# Altium PCB PCB.PcbDoc
Units mil, origin at the board's own origin, x right, y up, seen from the top; angles counter-clockwise.
Board outline 11290 x 5470 mil, 4 copper layers (Top Layer, Signal1, Signal2, Bottom Layer), stack 53.912 mil thick; 68 components, 74 nets, 190 pads, 16 vias.
Unrouted connection lines stored in the file: 1.
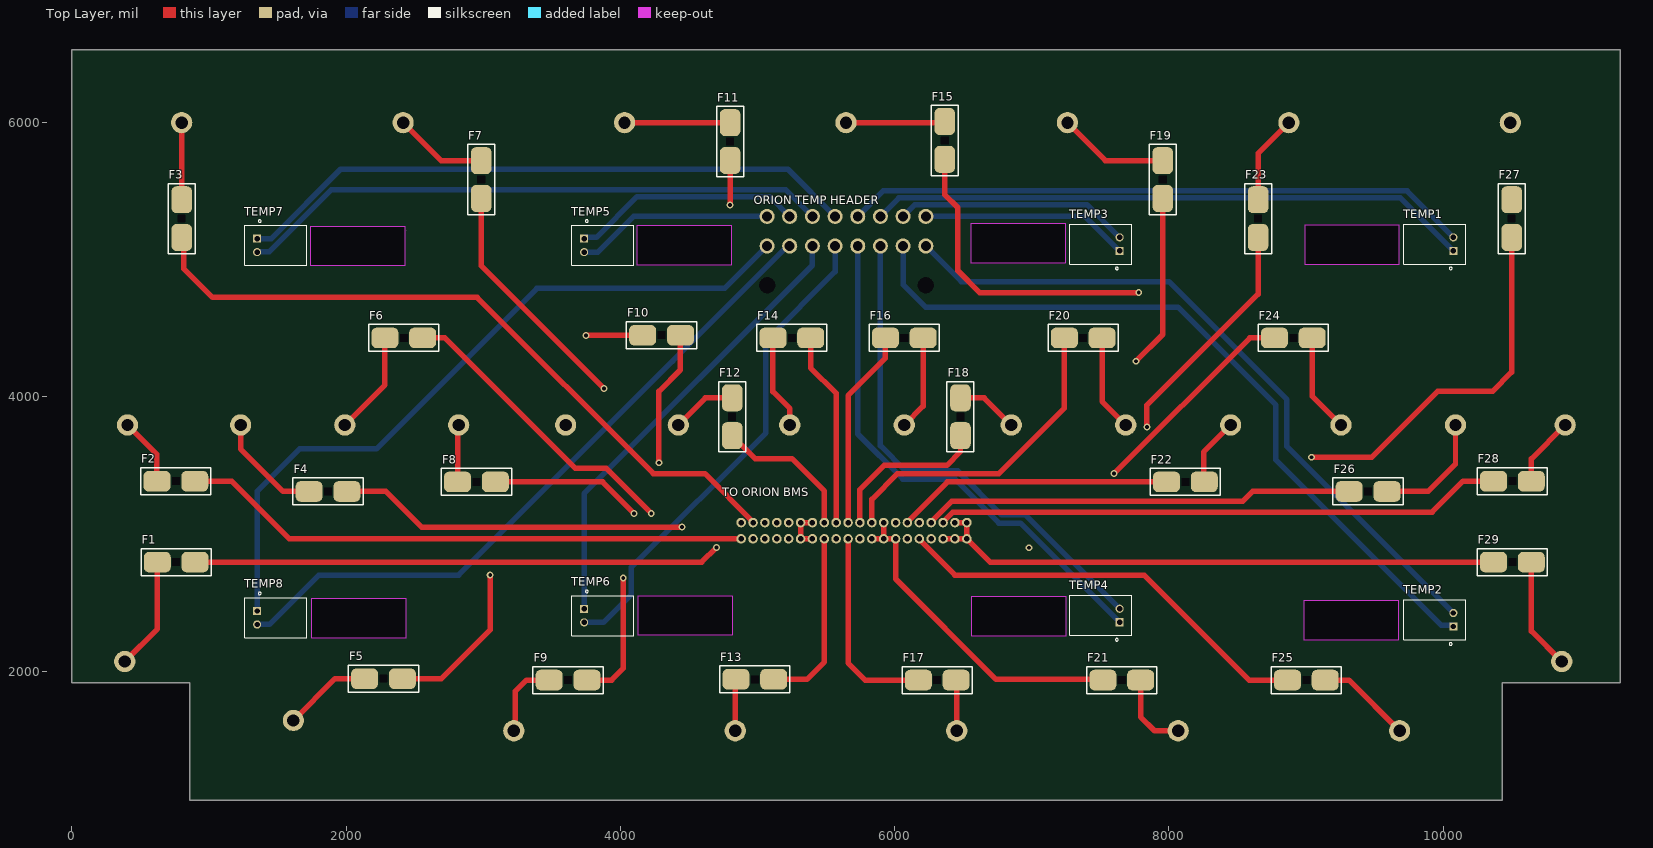
[diagram p0: Top Layer view]
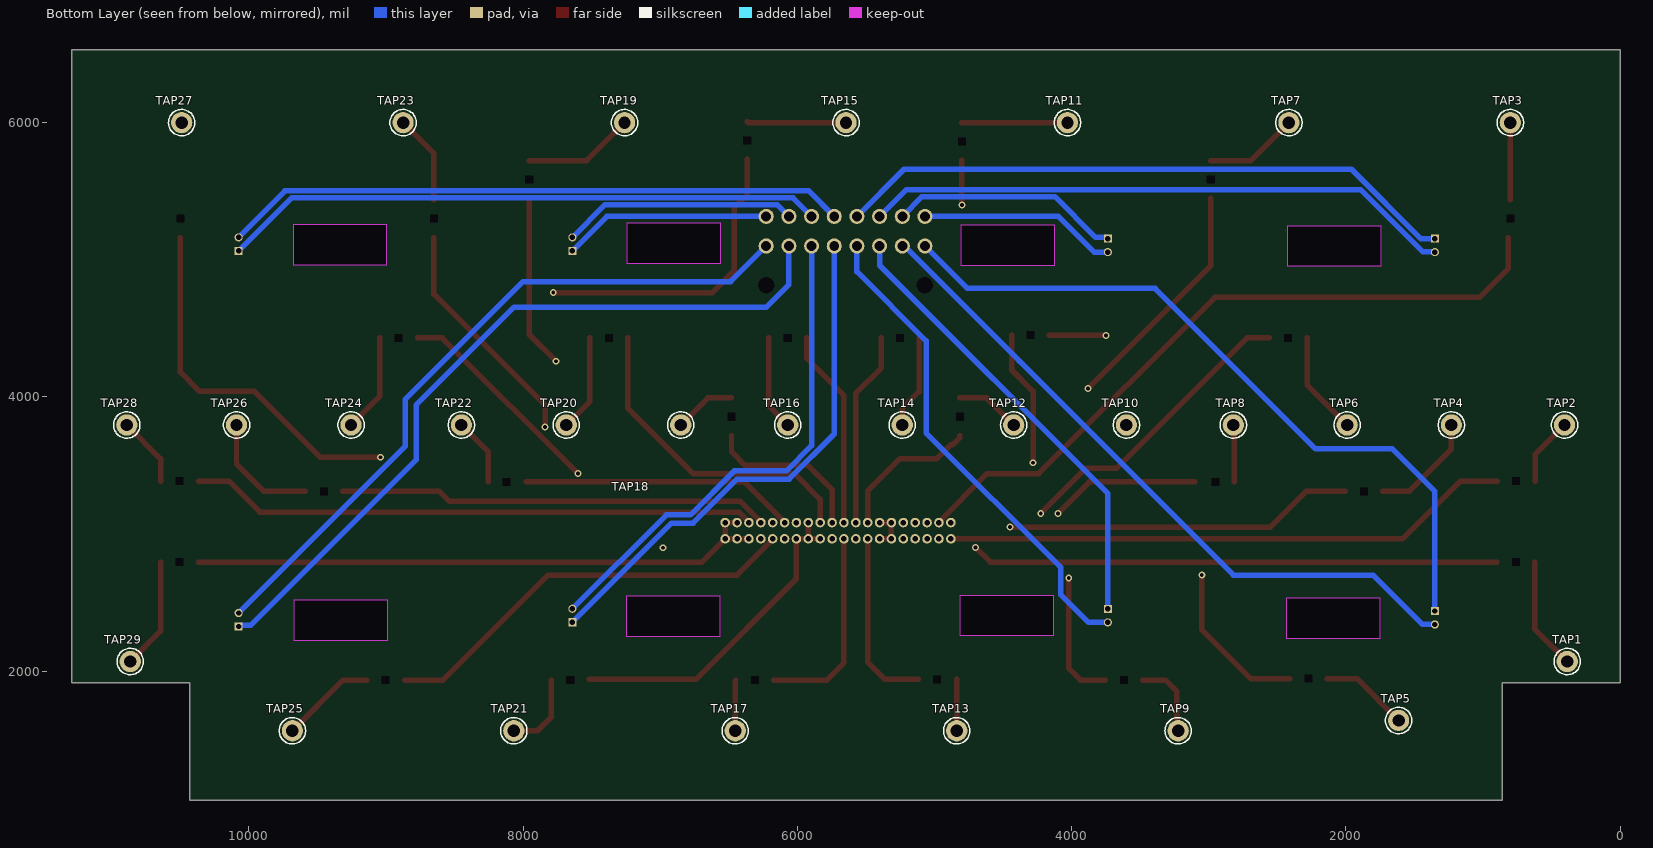
[diagram p1: Bottom Layer view, seen from below]
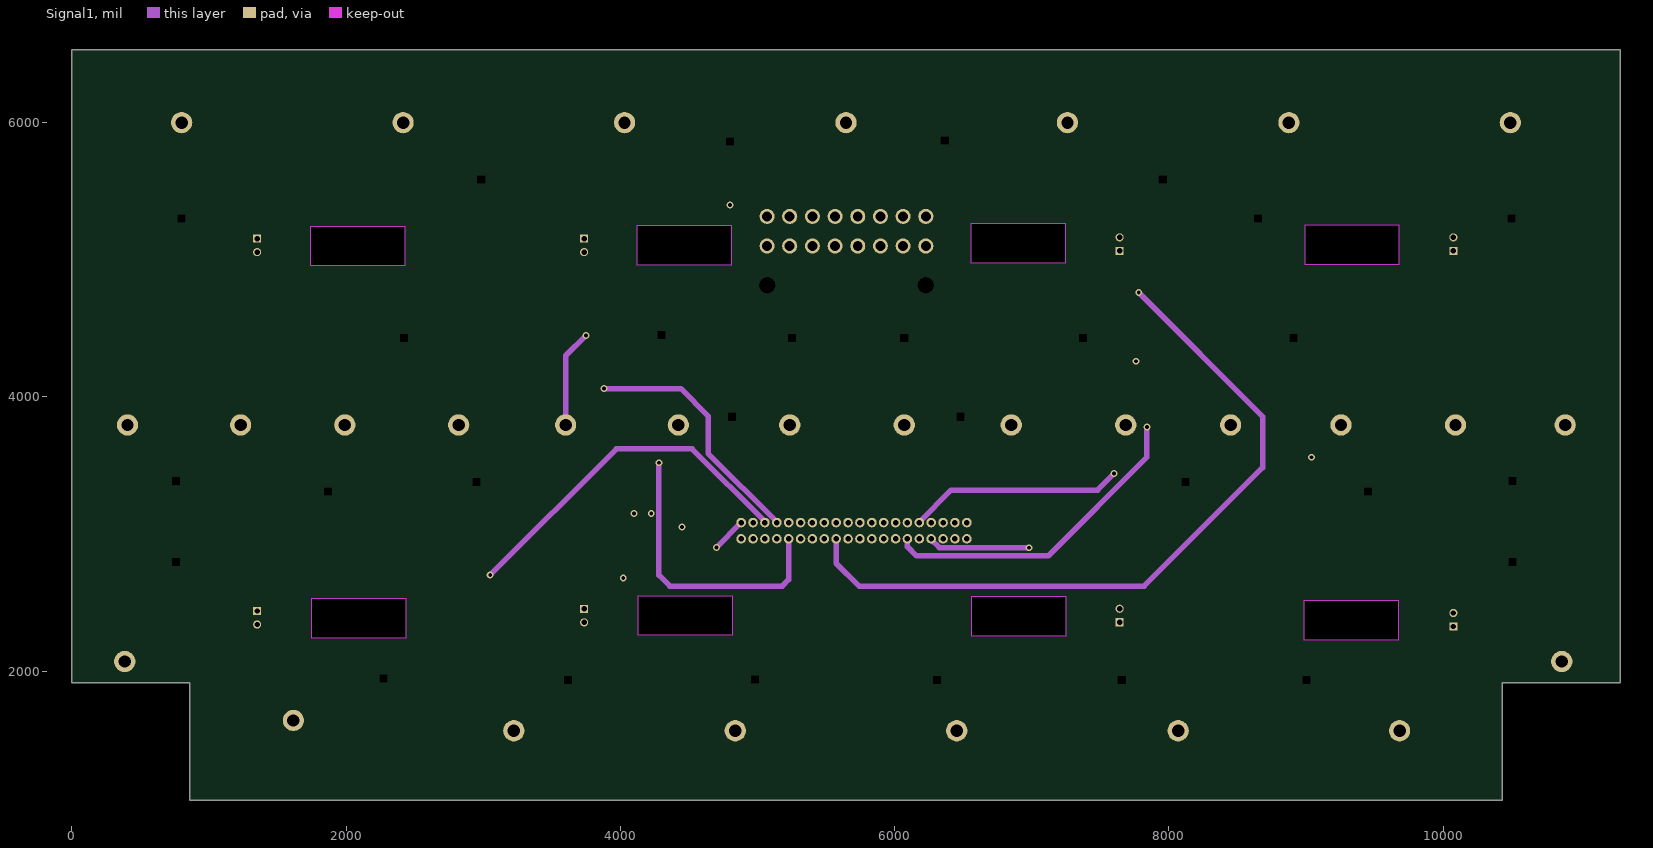
[diagram p2: Signal1]
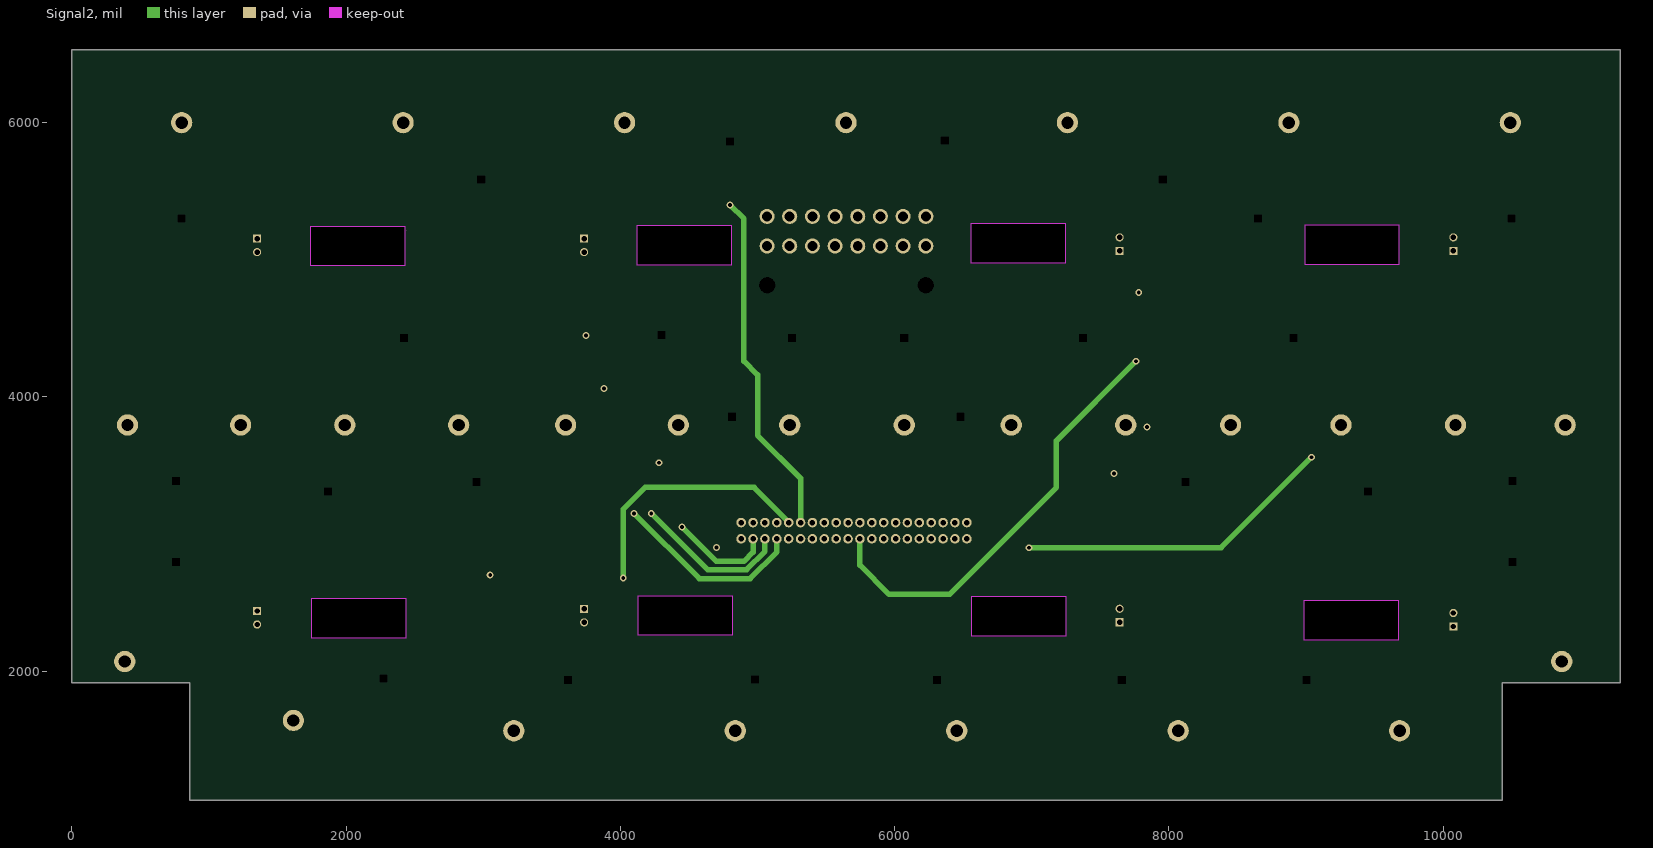
[diagram p3: Signal2]
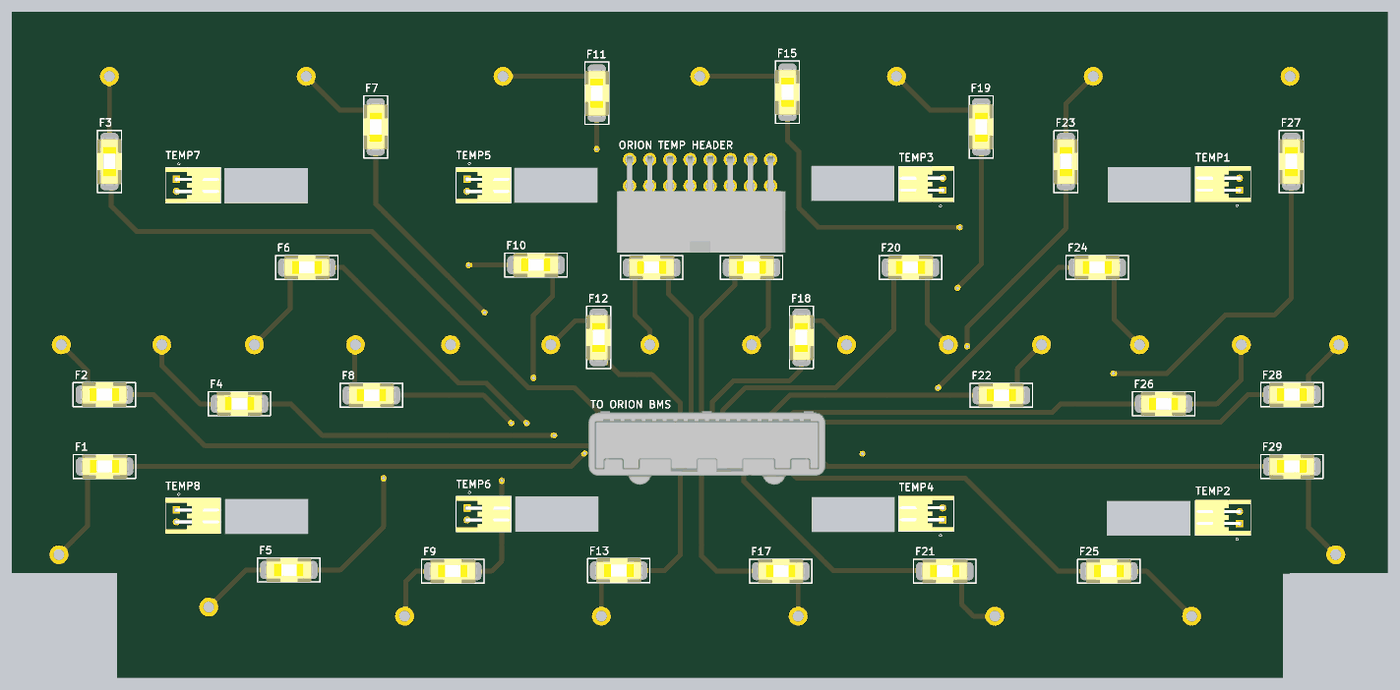
[diagram p4: 3D render of the assembled board from above, using the file's embedded part models]

## Layer stack, top to bottom
Top Solder: solder mask 1, SM-001, Dk 4
Top Layer: signal copper 1.3779
Dielectric 1: prepreg 5.1, PP-017, Dk 4.3
Dielectric 2: prepreg 5.1, PP-017, Dk 4.3
Signal1: signal copper 1.3779
Dielectric 3: core 28, Core-039, Dk 4.8
Signal2: signal copper 1.3779
Dielectric 4: prepreg 5.1, PP-017, Dk 4.3
Dielectric 5: prepreg 5.1, PP-017, Dk 4.3
Bottom Layer: signal copper 1.3779
Bottom Solder: solder mask 1, SM-001, Dk 4

## Board outline
0,1915 860,1915 860,1060 10430,1060 10430,1915 11290,1915 11290,6530 0,6530
cut-out: 8987.5,2515 9672.5,2515 9672.5,2225 8987.5,2225
cut-out: 6562.5,2545 7247.5,2545 7247.5,2255 6562.5,2255
cut-out: 8992.5,5255 9677.5,5255 9677.5,4965 8992.5,4965
cut-out: 6557.5,5265 7242.5,5265 7242.5,4975 6557.5,4975
cut-out: 1747.5,2530 2432.5,2530 2432.5,2240 1747.5,2240
cut-out: 4130,2550 4815,2550 4815,2260 4130,2260
cut-out: 4122.5,5250 4807.5,5250 4807.5,4960 4122.5,4960
cut-out: 2440,5215
cut-out: 1742.5,5245 2427.5,5245 2427.5,4955 1742.5,4955

## Design rules (kind name [scope] priority, off if disabled: settings)
Clearance [All] p1: gap=10 ignorepadtopadclearanceinfootprint=FALSE except(0: Arc-Hole Track-Hole SMDPad-Hole THPad-Hole Via-Hole Fill-Hole Poly-Hole Region-Hole Text-Hole)
PolygonConnect [All] p1: connectstyle=Relief reliefconductorwidth=10 reliefentries=4 polygonreliefangle="90 Angle" airgapwidth=10
RoutingVias [All] p1: holewidth=28 width=50 viastyle="Through Hole" minholewidth=28 minwidth=50 maxholewidth=28 maxwidth=50
SolderMaskExpansion [All] p1: expansion=4 istentingtop=FALSE
Width [All] p1: maxlimit=50 minlimit=10 preferedwidth=40
30 further rules are at their usual default settings.

## Components (designator, comment, footprint, x,y, rotation, side; value= is the part's Value field where it differs from the comment)
F1 "0154.750DR" "Omni BLOK 0154" 760,2795 r180 top
F2 "0154.750DR" "Omni BLOK 0154" 757.8,3385 r180 top
F3 "0154.750DR" "Omni BLOK 0154" 800,5300 r90 top
F4 "0154.750DR" "Omni BLOK 0154" 1867.2,3310 r180 top
F5 "0154.750DR" "Omni BLOK 0154" 2272.2,1945 r180 top
F6 "0154.750DR" "Omni BLOK 0154" 2420,4430 r180 top
F7 "0154.750DR" "Omni BLOK 0154" 2985,5585 r90 top
F8 "0154.750DR" "Omni BLOK 0154" 2950,3380 r180 top
F9 "0154.750DR" "Omni BLOK 0154" 3618.2,1935 r180 top
F10 "0154.750DR" "Omni BLOK 0154" 4300,4450 r180 top
F11 "0154.750DR" "Omni BLOK 0154" 4800,5862.2 r90 top
F12 "0154.750DR" "Omni BLOK 0154" 4815,3855 r90 top
F13 "0154.750DR" "Omni BLOK 0154" 4980,1940 r180 top
F14 "0154.750DR" "Omni BLOK 0154" 5250,4430 r180 top
F15 "0154.750DR" "Omni BLOK 0154" 6365,5870 r90 top
F16 "0154.750DR" "Omni BLOK 0154" 6070,4430 r0 top
F17 "0154.750DR" "Omni BLOK 0154" 6310.2,1935 r0 top
F18 "0154.750DR" "Omni BLOK 0154" 6480,3855 r90 top
F19 "0154.750DR" "Omni BLOK 0154" 7955,5585 r90 top
F20 "0154.750DR" "Omni BLOK 0154" 7375,4430 r0 top
F21 "0154.750DR" "Omni BLOK 0154" 7656.2,1935 r0 top
F22 "0154.750DR" "Omni BLOK 0154" 8120,3380 r0 top
F23 "0154.750DR" "Omni BLOK 0154" 8650,5300 r90 top
F24 "0154.750DR" "Omni BLOK 0154" 8907.2,4430 r0 top
F25 "0154.750DR" "Omni BLOK 0154" 9002.2,1935 r0 top
F26 "0154.750DR" "Omni BLOK 0154" 9452.2,3310 r0 top
F27 "0154.750DR" "Omni BLOK 0154" 10500,5300 r90 top
F28 "0154.750DR" "Omni BLOK 0154" 10505,3385 r0 top
F29 "0154.750DR" "Omni BLOK 0154" 10505,2795 r0 top
"ORION TEMP HEADER" "39300160" 39300160 6226.77,5100 r0 top
TAP1 "0850-0-15-20-83-14-11-0" 0850-0-15-20-83-14-11-0 385,2070 r180 bottom
TAP2 "0850-0-15-20-83-14-11-0" 0850-0-15-20-83-14-11-0 405,3795 r180 bottom
TAP3 "0850-0-15-20-83-14-11-0" 0850-0-15-20-83-14-11-0 800,6000 r180 bottom
TAP4 "0850-0-15-20-83-14-11-0" 0850-0-15-20-83-14-11-0 1230,3795 r180 bottom
TAP5 "0850-0-15-20-83-14-11-0" 0850-0-15-20-83-14-11-0 1615,1640 r180 bottom
TAP6 "0850-0-15-20-83-14-11-0" 0850-0-15-20-83-14-11-0 1990,3795 r180 bottom
TAP7 "0850-0-15-20-83-14-11-0" 0850-0-15-20-83-14-11-0 2415,6000 r180 bottom
TAP8 "0850-0-15-20-83-14-11-0" 0850-0-15-20-83-14-11-0 2820,3795 r180 bottom
TAP9 "0850-0-15-20-83-14-11-0" 0850-0-15-20-83-14-11-0 3222.5,1565 r180 bottom
TAP10 "0850-0-15-20-83-14-11-0" 0850-0-15-20-83-14-11-0 3600,3795 r180 bottom
TAP11 "0850-0-15-20-83-14-11-0" 0850-0-15-20-83-14-11-0 4030,6000 r180 bottom
TAP12 "0850-0-15-20-83-14-11-0" 0850-0-15-20-83-14-11-0 4422.31,3795 r180 bottom
TAP13 "0850-0-15-20-83-14-11-0" 0850-0-15-20-83-14-11-0 4837.5,1565 r180 bottom
TAP14 "0850-0-15-20-83-14-11-0" 0850-0-15-20-83-14-11-0 5235,3795 r180 bottom
TAP15 "0850-0-15-20-83-14-11-0" 0850-0-15-20-83-14-11-0 5645,6000 r180 bottom
TAP16 "0850-0-15-20-83-14-11-0" 0850-0-15-20-83-14-11-0 6070,3795 r180 bottom
TAP17 "0850-0-15-20-83-14-11-0" 0850-0-15-20-83-14-11-0 6452.5,1565 r180 bottom
TAP18 "0850-0-15-20-83-14-11-0" 0850-0-15-20-83-14-11-0 6850,3795 r180 bottom
TAP19 "0850-0-15-20-83-14-11-0" 0850-0-15-20-83-14-11-0 7260,6000 r180 bottom
TAP20 "0850-0-15-20-83-14-11-0" 0850-0-15-20-83-14-11-0 7685,3795 r180 bottom
TAP21 "0850-0-15-20-83-14-11-0" 0850-0-15-20-83-14-11-0 8067.5,1565 r180 bottom
TAP22 "0850-0-15-20-83-14-11-0" 0850-0-15-20-83-14-11-0 8450,3795 r180 bottom
TAP23 "0850-0-15-20-83-14-11-0" 0850-0-15-20-83-14-11-0 8875,6000 r180 bottom
TAP24 "0850-0-15-20-83-14-11-0" 0850-0-15-20-83-14-11-0 9255,3795 r180 bottom
TAP25 "0850-0-15-20-83-14-11-0" 0850-0-15-20-83-14-11-0 9682.5,1565 r180 bottom
TAP26 "0850-0-15-20-83-14-11-0" 0850-0-15-20-83-14-11-0 10090,3795 r180 bottom
TAP27 "0850-0-15-20-83-14-11-0" 0850-0-15-20-83-14-11-0 10490,6000 r180 bottom
TAP28 "0850-0-15-20-83-14-11-0" 0850-0-15-20-83-14-11-0 10890,3795 r180 bottom
TAP29 "0850-0-15-20-83-14-11-0" 0850-0-15-20-83-14-11-0 10865,2070 r180 bottom
TEMP1 "S2B-XH-A(LF)(SN)" S2B-XH-A(LF)(SN) 10080,5114.21 r90 top
TEMP2 "S2B-XH-A(LF)(SN)" S2B-XH-A(LF)(SN) 10080,2374.78 r90 top
TEMP3 "S2B-XH-A(LF)(SN)" S2B-XH-A(LF)(SN) 7645,5114.21 r90 top
TEMP4 "S2B-XH-A(LF)(SN)" S2B-XH-A(LF)(SN) 7645,2405.79 r90 top
TEMP5 "S2B-XH-A(LF)(SN)" S2B-XH-A(LF)(SN) 3730,5105 r270 top
TEMP6 "S2B-XH-A(LF)(SN)" S2B-XH-A(LF)(SN) 3730,2404.21 r270 top
TEMP7 "S2B-XH-A(LF)(SN)" S2B-XH-A(LF)(SN) 1345,5105 r270 top
TEMP8 "S2B-XH-A(LF)(SN)" S2B-XH-A(LF)(SN) 1345,2389.21 r270 top
"TO ORION BMS" "1376113-6" 1376113-6 5746.61,2965 r0 top

## Footprints (in the part's own frame and the unit in brackets; to place one, negate y for a bottom-side part, rotate by r counter-clockwise, add the part's x,y. Pads: shape width x height; smd on the part's side, far side on the other; paste and mask are expansions set on the pad)
0850-0-15-20-83-14-11-0 [mil]
  round 155 hole 90: 1(0,0)
  silkscreen extent -96,-96 96,96, body extent -77,-76 76,76, height 221
1376113-6 [mil]
  round 70 hole 40: 1(-866.14,118.11) 2(-866.14,0) 3(-779.53,118.11) 4(-779.53,0) 5(-692.91,118.11) 6(-692.91,0) 7(-606.3,118.11) 8(-606.3,0) 9(-519.69,118.11) 10(-519.69,0) 11(-433.07,118.11) 12(-433.07,0) 13(-346.46,118.11) 14(-346.46,0) 15(-259.84,118.11) 16(-259.84,0) 17(-173.23,118.11) 18(-173.23,0) 19(-86.61,118.11) 20(-86.61,0) 21(0,118.11) 22(0,0) 23(86.61,118.11) 24(86.61,0) 25(173.23,118.11) 26(173.23,0) 27(259.84,118.11) 28(259.84,0) 29(346.46,118.11) 30(346.46,0) 31(433.07,118.11) 32(433.07,0) 33(519.69,118.11) 34(519.69,0) 35(606.3,118.11) 36(606.3,0) 37(692.91,118.11) 38(692.91,0) 39(779.53,118.11) 40(779.53,0)
  body extent -1015,-321 930,281, height 940
39300160 [mm]
  round 2.8 hole 1.85: 1(0,0) 2(0,5.5) 3(-4.2,0) 4(-4.2,5.5) 5(-8.4,0) 6(-8.4,5.5) 7(-12.6,0) 8(-12.6,5.5) 9(-16.8,0) 10(-16.8,5.5) 11(-21,0) 12(-21,5.5) 13(-25.2,0) 14(-25.2,5.5) 15(-29.4,0) 16(-29.4,5.5)
  round 1.524 hole 3.05: ""(-29.4,-7.3) ""(0,-7.3)
  body extent -32.1,-13.9 3.1,6.03, height 11.4
"Omni BLOK 0154" [mm]
  rrect50% 5x3.81 smd: 1(3.5,0) 2(-3.5,0)
  rect 0x0 hole 1.4 square unplated: 3(0,0)
  silkscreen extent -6.5,-2.5 6.5,2.5, body extent -4.93,-2.52 4.9,2.51, height 3.81
S2B-XH-A(LF)(SN) [mm]
  rect 1.508x1.508 hole 1: 1(-1.25,0.127)
  round 1.508 hole 1: 2(1.25,0.127)
  silkscreen extent -4.75,-2.17 3.7,9.33, body extent -3.68,-2.19 3.72,9.31, height 6.15

## Part data
F1 F2 F3 F4 F5 F6 F7 F8 F9 F10 F11 F12 F13 F14 F15 F16 F17 F18 F19 F20 F21 F22 F23 F24 F25 F26 F27 F28 F29: "FUSE BOARD MNT 750MA 125VAC/VDC", Digikey Part Number=F1221CT-ND, Manufacturer="LittelFuse Inc", Digikey Link=https://www.digikey.com/product-detail/en/littelfuse-inc/0154.750DR/F1221CT-ND/183370, Part Number=0154.750DR
"ORION TEMP HEADER": Digikey Part Number=WM21358-ND, Angle=90, Contact=Tin, Flange=No, Part Number=39300160, Pitch=4.2mm, Positions=16, Row Spacing=5.5mm
TAP1 TAP2 TAP3 TAP4 TAP5 TAP6 TAP7 TAP8 TAP9 TAP10 TAP11 TAP12 TAP13 TAP14 TAP15 TAP16 TAP17 TAP18 TAP19 TAP20 TAP21 TAP22 TAP23 TAP24 TAP25 TAP26 TAP27 TAP28 TAP29: Digikey Part Number=ED90436-ND, Angle=90, Contact=Gold, Digikey Link=https://www.digikey.com.au/products/en?keywords=0850-0-15-20-83-14-11-0, Flange=NA, Part Number=0850-0-15-20-83-14-11-0, Pitch=NA, Positions=1, Row Spacing=NA
"TO ORION BMS": Digikey Part Number=A122206-ND, Angle=0, Contact=gold, Digikey Link=https://www.digikey.com.au/product-detail/en/te-connectivity-amp-connectors/1376113-2/A122206-ND/2273530, Part Number=1376113-6, Pitch=2.2, Positions=40, Row Spacing=3

## Via types
v1: diameter 50, hole 28, Top Layer to Bottom Layer, 16 vias

## Nets (pads, with @x,y where several pads share a name; then routed paths per layer and width w, separated by ;. In a path a pad name is that pad's centre, name@x,y a point inside that pad or via, vN(x,y) a via of type N, cw(c..) or ccw(c..) an arc to the next point about the centre after c; other vN are vias at no path point)
1: "TO ORION BMS.1" F1.2 | length 4102
  Top Layer w40: F1.2 4592.36,2795 v1(4700,2902.64)
  Signal1 w40: v1(4700,2902.64) 4880.47,3083.11
2: "TO ORION BMS.2" F2.2 | length 4158.9
  Top Layer w40: F2.2 1165,3385 1585,2965 4880.47,2965
3: "TO ORION BMS.3" F3.2 | length 5149.5
  Top Layer w40: F3.2@815,5162.2 815,4935 1025,4725 2955,4725 4240,3440 4615.51,3440 4967.09,3088.42 4967.09,3083.11
4: "TO ORION BMS.4" F4.2 | length 3299
  Top Layer w40: F4.2 2290,3310 2550,3050 v1(4450,3050)
  Signal2 w40: v1(4450,3050) 4700,2800 4900,2800 4967.09,2867.09 4967.09,2965
5: "TO ORION BMS.5" F5.2 | length 3795.8
  Top Layer w40: F5.2 2695,1945 3050,2300 v1(3050,2700)
  Signal1 w40: v1(3050,2700) 3970,3620 4522.12,3620 5056.36,3085.76
6: "TO ORION BMS.6" F6.2 | length 3342.6
  Top Layer w40: F6.2 2720,4430 3670,3480 3895,3480 v1(4225,3150)
  Signal2 w40: v1(4225,3150) 4635,2740 4920,2740 5053.7,2873.7 5053.7,2965
7: "TO ORION BMS.7" F7.2 | length 3584.9
  Top Layer w40: F7.2 2985,4955 v1(3880,4060)
  Signal1 w40: v1(3880,4060) 4440,4060 4640,3860 4640,3588.73 5140.31,3088.42 5140.31,3083.11
8: "TO ORION BMS.8" F8.2 | length 2507.7
  Top Layer w40: F8.2@3100.59,3380 3870,3380 v1(4100,3150)
  Signal2 w40: v1(4100,3150) 4575,2675 4945.71,2675 5140.31,2869.6 5140.31,2965
9: "TO ORION BMS.9" F9.2 | length 2841.9
  Top Layer w40: F9.2 3935,1935 4020,2020 v1(4020,2680)
  Signal1 w40: 5226.93,3083.11 5226.93,3088.42
  Signal2 w40: v1(4020,2680) 4020,3180 4180,3340 4975.35,3340 5226.93,3088.42
10: "TO ORION BMS.10" F10.2 | length 3112.9
  Top Layer w40: v1(4280,3520) 4280,4040 4437.8,4197.8 F10.2
  Signal1 w40: v1(4280,3520) 4280,2700 4360,2620 5180,2620 5226.93,2666.93 5226.93,2965
11: "TO ORION BMS.11" "TO ORION BMS.12" "TO ORION BMS.13" "TO ORION BMS.14" F11.2 | length 3145.4
  Top Layer w40: v1(4800,5400) F11.2 ; 5400.16,2965 5313.54,2965 5313.54,3083.11 5400.16,3083.11
  Signal2 w40: v1(4800,5400) 4900,5300 4900,4260 5000,4160 5000,3720 5313.54,3406.46 5313.54,3083.11
12: "TO ORION BMS.15" F12.2 | length 1077.4
  Top Layer w40: F12.2 4815,3703.25 4868.67,3649.58 4882.62,3649.58 4982.2,3550 5250,3550 5486.77,3313.23 5486.77,3083.11
13: "TO ORION BMS.16" F13.2 | length 1319.7
  Top Layer w40: F13.2 5360,1940 5486.77,2066.77 5486.77,2965
14: "TO ORION BMS.17" F14.2 | length 1423.8
  Top Layer w40: F14.2 5387.8,4212.2 5573.39,4026.61 5573.39,3083.11
15: "TO ORION BMS.18" F15.2 | length 7603.7
  Top Layer w40: F15.2 6365,5475 6460,5380 6460,4920 6620,4760 v1(7780,4760)
  Signal1 w40: 5573.39,2965 5573.39,2786.61 5740,2620 7820,2620 8683.43,3483.43 8683.43,3856.57 v1(7780,4760)
16: "TO ORION BMS.19" F16.2 | length 1459.6
  Top Layer w40: 5660,3083.11 5660,4010 5932.2,4282.2 F16.2
17: "TO ORION BMS.20" F17.2 | length 1469.2
  Top Layer w40: 5660,2965 5660,2060 5785,1935 F17.2
18: "TO ORION BMS.21" F18.2 | length 1205.3
  Top Layer w40: 5746.61,3083.11 5746.61,3323.18 5923.43,3500 6380,3500 6480,3600 F18.2
19: "TO ORION BMS.22" F19.2 | length 4464.7
  Top Layer w40: v1(7760,4260) 7955,4455 F19.2
  Signal2 w40: 5746.61,2965 5746.61,2773.39 5960,2560 6400,2560 7180,3340 7180,3680 v1(7760,4260)
20: "TO ORION BMS.23" F20.2 | length 2361.9
  Top Layer w40: 5833.23,3083.11 5833.23,3253.23 6020,3440 6760,3440 7237.2,3917.2 F20.2
21: "TO ORION BMS.24" "TO ORION BMS.25" "TO ORION BMS.26" "TO ORION BMS.28" F21.2 | length 2398.6
  Top Layer w40: 5833.23,2965 5919.84,2965 ; 5919.84,3083.11 5919.84,2965 ; F21.2@7518.41,1940 6740,1940 6006.46,2673.54 6006.46,2965 5919.84,2965
22: "TO ORION BMS.29" F22.2 | length 2010.2
  Top Layer w40: 6093.07,3083.11 6093.07,3088.42 6384.65,3380 F22.2@7977.2,3380
23: "TO ORION BMS.30" F23.2 | length 4068.7
  Top Layer w40: v1(7840,3780) 7840,3940 8650,4750 F23.2
  Signal1 w40: 6093.07,2965 6093.07,2906.93 6160,2840 7120,2840 7840,3560 v1(7840,3780)
24: "TO ORION BMS.31" F24.2 | length 3156
  Top Layer w40: v1(7600,3440) 8590,4430 F24.2
  Signal1 w40: 6179.69,3083.11 6179.69,3088.42 6411.27,3320 7480,3320 v1(7600,3440)
  Signal2 w40: 6179.69,3083.11 6179.69,3088.42
25: "TO ORION BMS.32" F25.2 | length 3114.5
  Top Layer w40: 6179.69,2965 6179.69,2959.69 6439.38,2700 7820,2700 8585,1935 F25.2
26: "TO ORION BMS.33" F26.2 | length 3145.2
  Top Layer w40: 6266.3,3083.11 6266.3,3088.42 6417.88,3240 8540,3240 8610,3310 F26.2
27: "TO ORION BMS.34" F27.2 | length 5776.1
  Top Layer w40: v1(9040,3560) 9480,3560 9960,4040 10360,4040 10500,4180 F27.2
  Signal1 w40: 6266.3,2965 6266.3,2959.69 6325.99,2900 v1(6980,2900)
  Signal2 w40: v1(6980,2900) 8380,2900 v1(9040,3560)
28: "TO ORION BMS.35" F28.2 | length 4142.4
  Top Layer w40: 6352.91,3083.11 6352.91,3088.42 6424.49,3160 9920,3160 10145,3385 F28.2
29: "TO ORION BMS.36" "TO ORION BMS.37" "TO ORION BMS.38" "TO ORION BMS.39" "TO ORION BMS.40" F29.2 | length 4289.4
  Top Layer w40: 6352.91,2965 6439.53,2965 6526.14,2965 ; 6439.53,3083.11 6526.14,3083.11 6526.14,2965 ; F29.2 6696.14,2795 6526.14,2965
NetF1_1: F1.1 TAP1.1 | length 823.3
  Top Layer w40: TAP1.1 622.2,2307.2 F1.1
NetF2_1: F2.1 TAP2.1 | length 499.1
  Top Layer w40: TAP2.1 620,3580 F2.1
NetF3_1: F3.1 TAP3.1 | length 562.2
  Top Layer w40: F3.1 TAP3.1
NetF4_1: F4.1 TAP4.1 | length 802.8
  Top Layer w40: TAP4.1 1230,3620 1540,3310 F4.1
NetF5_1: F5.1 TAP5.1 | length 645.7
  Top Layer w40: TAP5.1 1920,1945 F5.1
NetF6_1: F6.1 TAP6.1 | length 756
  Top Layer w40: TAP6.1 2282.2,4087.2 F6.1
NetF7_1: F7.1 TAP7.1 | length 684.8
  Top Layer w40: TAP7.1 2692.2,5722.8 F7.1
NetF8_1: F8.1 TAP8.1 | length 418.2
  Top Layer w40: F8.1 2812.2,3787.2 TAP8.1
NetF9_1: F9.1 TAP9.1 | length 573.7
  Top Layer w40: TAP9.1 3233.95,1576.45 3233.95,1853.95 3315,1935 F9.1
NetF10_1: F10.1 TAP10.1 | length 1134.9
  Top Layer w40: v1(3748.75,4448.75) 3750,4450 F10.1
  Signal1 w40: TAP10.1 3600,4300 v1(3748.75,4448.75)
  Bottom Layer w40: TAP10.1 TAP10.1@3600,3800.59
NetF11_1: F11.1 TAP11.1 | length 770
  Top Layer w40: TAP11.1 F11.1
NetF12_1: F12.1 TAP12.1 | length 474.6
  Top Layer w40: TAP12.1 4620.1,3992.8 F12.1
NetF13_1: F13.1 TAP13.1 | length 375
  Top Layer w40: TAP13.1 F13.1@4837.5,1940
NetF14_1: F14.1 TAP14.1 | length 685.9
  Top Layer w40: F14.1 5112.2,4037.8 5235,3915 TAP14.1
NetF15_1: F15.1 TAP15.1 | length 723.2
  Top Layer w40: TAP15.1 6357.2,6000 F15.1
NetF16_1: F16.1 TAP16.1 | length 692.1
  Top Layer w40: TAP16.1 6207.8,3932.8 F16.1
NetF17_1: F17.1 TAP17.1 | length 371.9
  Top Layer w40: F17.1 6452.5,1930.5 TAP17.1
NetF18_1: F18.1 TAP18.1 | length 451.9
  Top Layer w40: F18.1 6652.2,3992.8 TAP18.1
NetF19_1: F19.1 TAP19.1 | length 809.8
  Top Layer w40: TAP19.1 7537.2,5722.8 F19.1
NetF20_1: F20.1 TAP20.1 | length 706.3
  Top Layer w40: F20.1 7512.8,3967.2 TAP20.1
NetF21_1: F21.1 TAP21.1 | length 584.3
  Top Layer w40: F21.1 7794,1666 7895,1565 TAP21.1
NetF22_1: F22.1 TAP22.1 | length 496.7
  Top Layer w40: F22.1@8252.8,3380 8252.8,3597.8 TAP22.1
NetF23_1: F23.1 TAP23.1 | length 655.4
  Top Layer w40: F23.1 8650,5775 TAP23.1
NetF24_1: F24.1 TAP24.1 | length 722
  Top Layer w40: F24.1 9045,4005 TAP24.1
NetF25_1: F25.1 TAP25.1 | length 695.8
  Top Layer w40: F25.1 9312.5,1935 TAP25.1
NetF26_1: F26.1 TAP26.1 | length 867.8
  Top Layer w40: F26.1 9890,3310 10090,3510 TAP26.1
NetF27_1: F27.1 TAP27.1
NetF28_1: F28.1 TAP28.1 | length 512.4
  Top Layer w40: F28.1 10642.8,3547.8 TAP28.1
NetF29_1: F29.1 TAP29.1 | length 817
  Top Layer w40: F29.1 10642.8,2292.2 TAP29.1
TEMP+1: "ORION TEMP HEADER.6" TEMP1.1 | length 4395.1
  Bottom Layer w40: 5896.06,5316.54 6031.18,5451.65 9688.35,5451.65 TEMP1.1
TEMP+2: "ORION TEMP HEADER.3" TEMP2.1 | length 5562
  Bottom Layer w40: 6061.42,5100 6061.42,4818.58 6225,4655 8065,4655 8780,3940 8780,3540 9985.31,2334.69 10065.89,2334.69 TEMP2.1
TEMP+3: "ORION TEMP HEADER.2" TEMP3.1 | length 1517.4
  Bottom Layer w40: 6226.77,5316.54 7388.46,5316.54 TEMP3.1
TEMP+4: "ORION TEMP HEADER.7" TEMP4.1 | length 3848.6
  Bottom Layer w40: 5730.71,5100 5730.71,3729.29 6060,3400 6440,3400 6760,3080 6916.57,3080 TEMP4.1
TEMP+5: "ORION TEMP HEADER.14" TEMP5.1 | length 1685.7
  Bottom Layer w40: TEMP5.1 3744.69,5163.9 3824.69,5163.9 4120.79,5460 5091.18,5460 5234.65,5316.54
TEMP+6: "ORION TEMP HEADER.11" TEMP6.1 | length 3336.2
  Bottom Layer w40: TEMP6.1 3735,3295 5400,4960 5400,5100
TEMP+7: "ORION TEMP HEADER.10" TEMP7.1 | length 4567.1
  Bottom Layer w40: TEMP7.1 1454.21,5154.21 1960,5660 5221.89,5660 5565.35,5316.54
TEMP+8: "ORION TEMP HEADER.15" TEMP8.1 | length 5332.3
  Bottom Layer w40: TEMP8.1 1350,3310 1660,3620 2220,3620 3390.71,4790.71 4760,4790.71 5069.29,5100
TEMP-1: "ORION TEMP HEADER.8" TEMP1.2 | length 4561.1
  Bottom Layer w40: 5730.71,5316.54 5915.83,5501.65 9736.77,5501.65 TEMP1.2
TEMP-2: "ORION TEMP HEADER.1" TEMP2.2 | length 5156.4
  Bottom Layer w40: 6226.77,5100 6486.77,4840 8000,4840 8860,3980 8860,3639 TEMP2.2
TEMP-3: "ORION TEMP HEADER.4" TEMP3.2 | length 1712.5
  Bottom Layer w40: 6061.42,5316.54 6146.54,5401.65 7401.77,5401.65 TEMP3.2
TEMP-4: "ORION TEMP HEADER.5" TEMP4.2 | length 3692.5
  Bottom Layer w40: 5896.06,5100 5896.06,3643.94 6080,3460 6460,3460 6780,3140 6955,3140 TEMP4.2
TEMP-5: "ORION TEMP HEADER.16" TEMP5.2 | length 1442.3
  Bottom Layer w40: TEMP5.2 3835.79,5055.79 4096.54,5316.54 5069.29,5316.54
TEMP-6: "ORION TEMP HEADER.9" TEMP6.2 | length 3585.2
  Bottom Layer w40: TEMP6.2 3875,2355 4080,2560 4080,2757.78 5060,3737.78 5060,4408.41 5565.35,4913.77 5565.35,5100
TEMP-7: "ORION TEMP HEADER.12" TEMP7.2 | length 4318.3
  Bottom Layer w40: TEMP7.2 1353.71,5059.49 1439.22,5059.49 1889.73,5510 5206.54,5510 5400,5316.54
TEMP-8: "ORION TEMP HEADER.13" TEMP8.2 | length 5027.9
  Bottom Layer w40: TEMP8.2 1440,2340 1800,2700 2820,2700 4380,4260 5220,5100 5234.65,5100
pads on no net: "ORION TEMP HEADER." "TO ORION BMS.27" F1.3 F2.3 F3.3 F4.3 F5.3 F6.3 F7.3 F8.3 F9.3 F10.3 F11.3 F12.3 F13.3 F14.3 F15.3 F16.3 F17.3 F18.3 F19.3 F20.3 F21.3 F22.3 F23.3 F24.3 F25.3 F26.3 F27.3 F28.3 F29.3